# EAGLE board MousePCB (EAGLE 9.7.0)
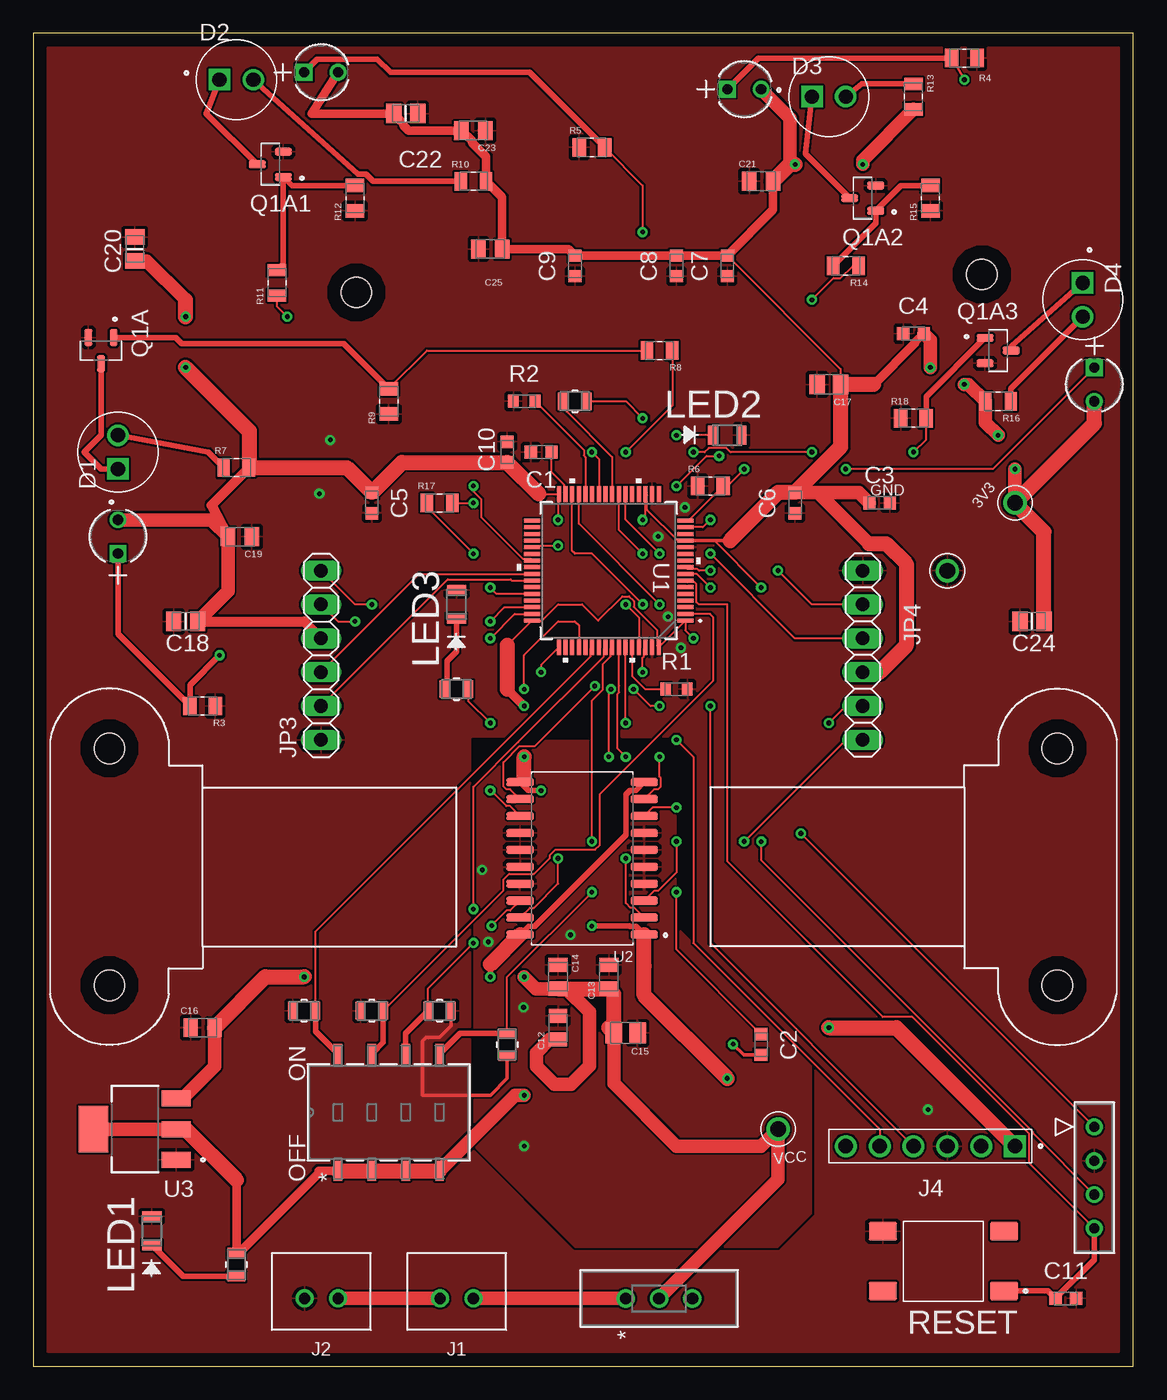
[diagram p0: board, top side]
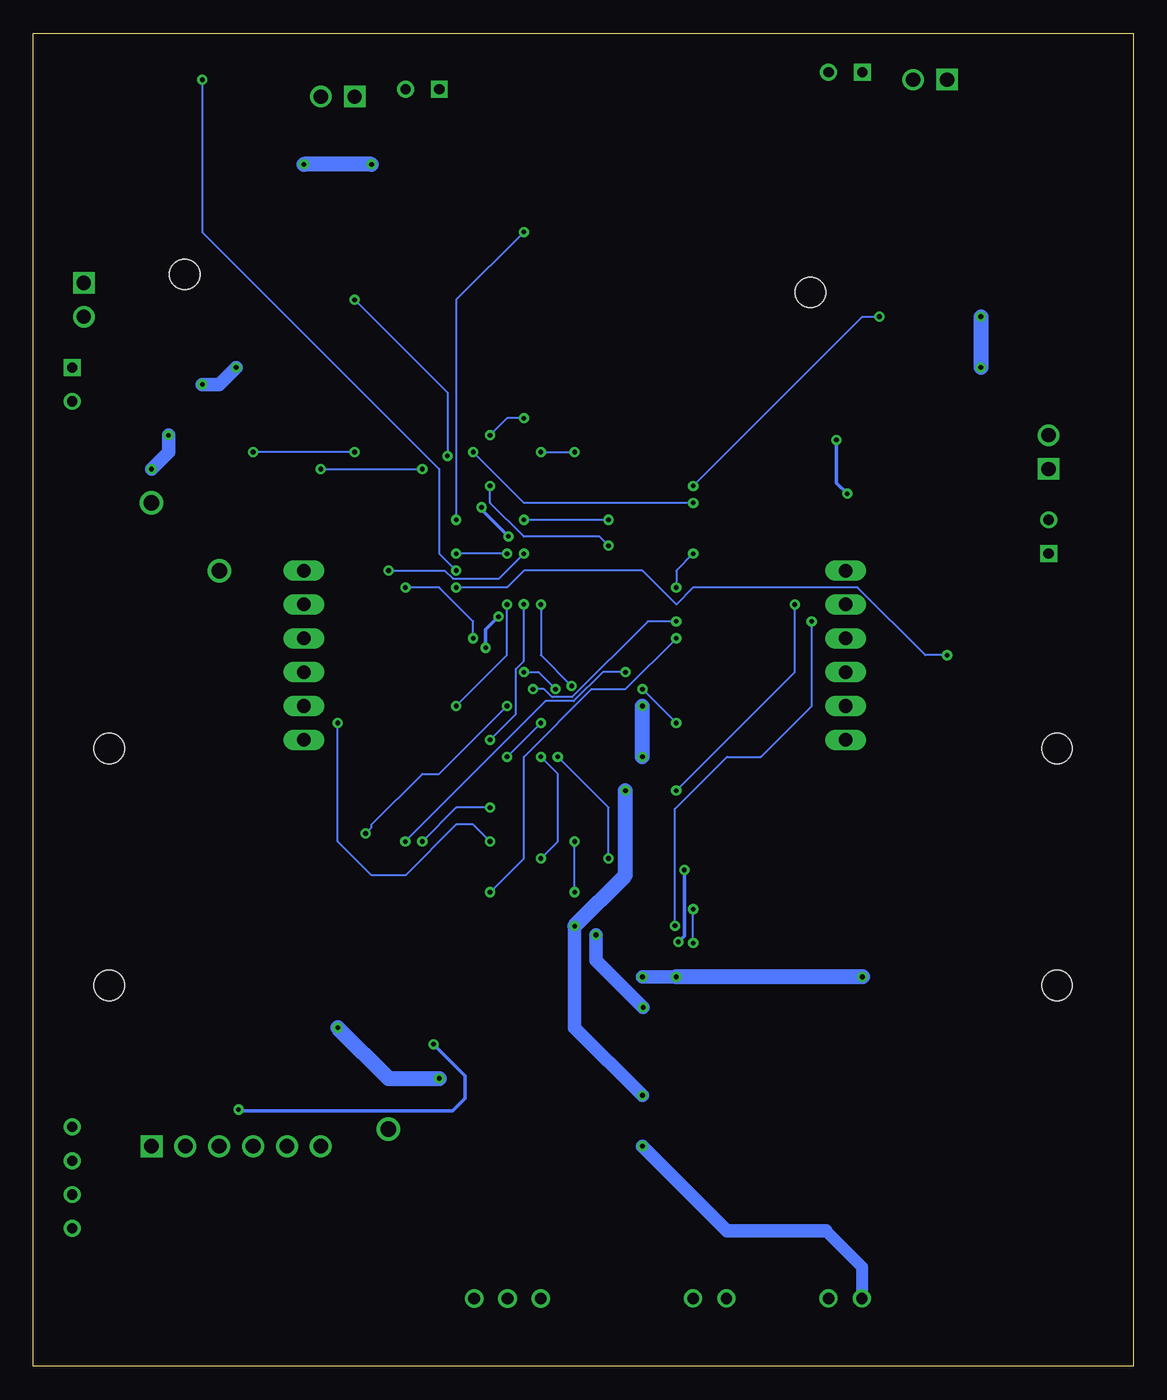
[diagram p1: board, bottom side, seen from below]

Size 82.53 x 100 mm. Coordinates in mm from the lower left corner, seen from the top.
Outline: 0,0 82.53,0 82.53,100 0,100 0,0
Copper layers (1*16): Top / Bottom
Stack-up Default Layer Stack: Top User Defined 0.035mm / Dielectric-1 User Defined 1.5mm / Bottom User Defined 0.035mm
Design rules: minimum drill size 0.35mm, minimum copper width 6mil, keepout clearance 0mil, drill distance 6mil, dimension clearance 40mil, restrict clearance 0mil, copper clearance wire_polygon to wire_polygon 6mil, copper clearance wire_polygon to pad_smd 6mil, copper clearance wire_polygon to via 6mil, copper clearance pad_smd to pad_smd 6mil, copper clearance pad_smd to via 6mil, copper clearance via to via 6mil, copper clearance smd to pad (same net) 6mil, copper clearance smd to via (same net) 6mil, copper clearance smd to smd (same net) 6mil
Holes 2.29 mm at 24.23,80.57 71.17,81.92

## Footprints (pad centres in the part's own frame; a part is rotated, then mirrored left to right if it is on the bottom)
KEYSTONE_5000 = drill 1.17: 1 0,0
CAPC1608X85 = smd 0.921 x 0.97: 1 -0.775,0; 2 0.775,0
CAPC2012X135N = smd 1.05 x 1.38: 1 -0.888,0; 2 0.888,0
CAPC2012X140N = smd 1.08 x 1.42: 1 -0.895,0; 2 0.895,0
CAPC2012X88N = smd 1.24 x 1.56: 1 -0.885,0; 2 0.885,0
CAPC2012X145N = smd 1.15 x 1.47: 1 -0.88,0; 2 0.88,0
CAPC2012X140N' = smd 1.15 x 1.45: 1 -0.9,0; 2 0.9,0
LEDRD254W55D595H900 = drill 1.07 pad 1.61: A 1.27,0 | drill 1.07 pad 1.61 square: C -1.27,0
B2B-XH-A = drill 0.84: 1 0,0; 2 2.5,0
CONN_PPTC041LFBN-RC_SUL = drill 0.762 pad 1.27: 1 0,0; 2 -2.54,0; 3 -5.08,0; 4 -7.62,0
WURTH_61300611121 = drill 1.1 pad 1.45 square: 01 -6.35,0 | drill 1.1 pad 1.45: 02 -3.81,0; 03 -1.27,0; 04 1.27,0; 05 3.81,0; 06 6.35,0
1X06 = drill 1.016 long: 1 -6.35,0; 2 -3.81,0; 3 -1.27,0; 4 1.27,0; 5 3.81,0; 6 6.35,0
LED_CMD17-21VGD_TR8 = smd 0.762 x 1.448: 1 -1.067,0; 2 1.067,0
MOTOR = hole 2.286: -28.575,14.605; -28.575,-3.175
SOT95P230X110-3N = smd 1.26 x 0.59: 1 -0.98,0.95; 2 -0.98,-0.95; 3 0.98,0
NONEP157X157-2_LTO = drill 0.762 pad 1.27 square: 1 0,0 | drill 0.762 pad 1.27: 2 2.54,0
RESC1608X60 = smd 0.799 x 0.974: 1 -0.815,0; 2 0.815,0
RESC2012X65N = smd 1.01 x 1.38: 1 -0.95,0; 2 0.95,0
RESC2012X60N = smd 0.92 x 1.38: 1 -0.955,0; 2 0.955,0
RES_RMCF0805_STP-L = smd 0.762 x 1.295: 1 -0.876,0; 2 0.876,0
STA_RMCF0805_STP-L = smd 0.711 x 1.295: 1 -0.851,0; 2 0.851,0
TE_FSM4JSMA = smd 2.1 x 1.38: 1 -4.55,2.24; 2 4.55,2.24; 3 -4.55,-2.24; 4 4.55,-2.24
219-4-M_CTS-L = smd 1.499 x 0.635: 1 -4.394,3.81; 2 -4.394,1.27; 3 -4.394,-1.27; 4 -4.394,-3.81; 5 4.394,-3.81; 6 4.394,-1.27; 7 4.394,1.27; 8 4.394,3.81
SW_1218_EWI = drill 0.889 pad 1.397: 1 0,0; 2 0,-2.5; 3 0,-5
LQFP64-10X10MM = smd 1.194 x 0.305: 1 -5.75,3.75; 2 -5.75,3.25; 3 -5.75,2.75; 4 -5.75,2.25; 5 -5.75,1.75; 6 -5.75,1.25; 7 -5.75,0.75; 8 -5.75,0.25; 9 -5.75,-0.25; 10 -5.75,-0.75; 11 -5.75,-1.25; 12 -5.75,-1.75; 13 -5.75,-2.25; 14 -5.75,-2.75; 15 -5.75,-3.25; 16 -5.75,-3.75; 33 5.75,-3.75; 34 5.75,-3.25; 35 5.75,-2.75; 36 5.75,-2.25; 37 5.75,-1.75; 38 5.75,-1.25; 39 5.75,-0.75; 40 5.75,-0.25; 41 5.75,0.25; 42 5.75,0.75; 43 5.75,1.25; 44 5.75,1.75; 45 5.75,2.25; 46 5.75,2.75; 47 5.75,3.25; 48 5.75,3.75 | smd 0.305 x 1.194: 17 -3.75,-5.75; 18 -3.25,-5.75; 19 -2.75,-5.75; 20 -2.25,-5.75; 21 -1.75,-5.75; 22 -1.25,-5.75; 23 -0.75,-5.75; 24 -0.25,-5.75; 25 0.25,-5.75; 26 0.75,-5.75; 27 1.25,-5.75; 28 1.75,-5.75; 29 2.25,-5.75; 30 2.75,-5.75; 31 3.25,-5.75; 32 3.75,-5.75; 49 3.75,5.75; 50 3.25,5.75; 51 2.75,5.75; 52 2.25,5.75; 53 1.75,5.75; 54 1.25,5.75; 55 0.75,5.75; 56 0.25,5.75; 57 -0.25,5.75; 58 -0.75,5.75; 59 -1.25,5.75; 60 -1.75,5.75; 61 -2.25,5.75; 62 -2.75,5.75; 63 -3.25,5.75; 64 -3.75,5.75
SOIC127P1032X265-20N = smd 2.05 x 0.6: 1 -4.655,5.715; 2 -4.655,4.445; 3 -4.655,3.175; 4 -4.655,1.905; 5 -4.655,0.635; 6 -4.655,-0.635; 7 -4.655,-1.905; 8 -4.655,-3.175; 9 -4.655,-4.445; 10 -4.655,-5.715; 11 4.655,-5.715; 12 4.655,-4.445; 13 4.655,-3.175; 14 4.655,-1.905; 15 4.655,-0.635; 16 4.655,0.635; 17 4.655,1.905; 18 4.655,3.175; 19 4.655,4.445; 20 4.655,5.715
SOT230P700X185-4N = smd 2.2 x 1.2: 1 -3.1,2.3; 2 -3.1,0; 3 -3.1,-2.3 | smd 2.2 x 3.5: 4 3.1,0

## Placement (x,y rotation side)
3V3  5000  [KEYSTONE_5000]  73.66,64.77 52.2 top
C1  2.2 μF  [CAPC1608X85]  38.1,68.58 180 top
C2  2.2 μF  [CAPC1608X85]  54.61,24.13 270 top
C3  0.1 μF  [CAPC1608X85]  63.5,64.77 0 top
C4  0.1 μF  [CAPC1608X85]  66.04,77.47 0 top
C5  1 μF  [CAPC1608X85]  25.4,64.77 270 top
C6  0.1 μF  [CAPC1608X85]  57.15,64.77 90 top
C7  0.1 μF  [CAPC1608X85]  52.07,82.55 90 top
C8  0.1 μF  [CAPC1608X85]  48.26,82.55 90 top
C9  0.1 μF  [CAPC1608X85]  40.64,82.55 90 top
C10  10 μF  [CAPC1608X85]  35.56,68.58 270 top
C11  0.1 μF  [CAPC1608X85]  77.47,5.08 0 top
C12  10uF  [CAPC2012X135N]  39.37,25.4 90 top
C13  4.7uF  [CAPC2012X140N]  43.18,29.21 90 top
C14  4.7uF  [CAPC2012X140N]  39.37,29.21 270 top
C15  0.1uF  [CAPC2012X88N]  44.45,25 180 top
C16  10 uF  [CAPC2012X135N]  12.7,25.4 0 top
C17  10 uF  [CAPC2012X145N]  59.69,73.66 180 top
C18  0.1uF  [CAPC2012X140N']  11.43,55.88 180 top
C19  4.7 uF  [CAPC2012X140N]  15.5,62.23 180 top
C20  0.1uF  [CAPC2012X140N']  7.62,83.82 90 top
C21  4.7 uF  [CAPC2012X140N]  54.61,88.9 0 top
C22  0.1uF  [CAPC2012X140N']  27.94,93.98 0 top
C23  4.7 uF  [CAPC2012X140N]  33.02,92.71 180 top
C24  0.1uF  [CAPC2012X140N']  74.93,55.88 180 top
C25  4.7 uF  [CAPC2012X140N]  34.29,83.82 0 top
D1  IREMITTER  [LEDRD254W55D595H900]  6.35,68.58 90 top
D2  IREMITTER  [LEDRD254W55D595H900]  15.24,96.52 0 top
D3  IREMITTER  [LEDRD254W55D595H900]  59.69,95.25 0 top
D4  IREMITTER  [LEDRD254W55D595H900]  78.74,80.01 270 top
GND  5000  [KEYSTONE_5000]  68.58,59.69 0 top
J1  B2B-XH-A  [B2B-XH-A]  33.02,5.08 180 top
J2  B2B-XH-A  [B2B-XH-A]  22.86,5.08 180 top
J3  [CONN_PPTC041LFBN-RC_SUL]  79.61,17.95 90 top
J4  [WURTH_61300611121]  67.31,16.51 180 top
JP3  PINHD-1X6  [1X06]  21.59,53.34 90 top
JP4  PINHD-1X6  [1X06]  62.23,53.34 270 top
LED1  [LED_CMD17-21VGD_TR8]  8.89,10.16 90 top
LED2  [LED_CMD17-21VGD_TR8]  52.07,69.85 0 top
LED3  [LED_CMD17-21VGD_TR8]  31.75,57.15 90 top
M1  MOTOR  [MOTOR]  48.26,43.18 180 top
M2  MOTOR  [MOTOR]  34.29,31.75 0 top
Q1A  MOSFET  [SOT95P230X110-3N]  5.08,76.2 270 top
Q1A1  MOSFET  [SOT95P230X110-3N]  17.78,90.17 180 top
Q1A2  MOSFET  [SOT95P230X110-3N]  62.23,87.63 180 top
Q1A3  MOSFET  [SOT95P230X110-3N]  72.39,76.2 0 top
Q2A  [NONEP157X157-2_LTO]  52.07,95.81 0 top
Q2A1  [NONEP157X157-2_LTO]  6.35,60.96 90 top
Q2A2  [NONEP157X157-2_LTO]  20.32,97.08 0 top
Q2A3  [NONEP157X157-2_LTO]  79.61,74.93 270 top
R1  10K  [RESC1608X60]  48.26,50.8 0 top
R2  10K  [RESC1608X60]  36.83,72.39 0 top
R3  1.8 kOhms  [RESC2012X65N]  12.7,49.53 180 top
R4  1.8 kOhms  [RESC2012X65N]  69.85,98.14 180 top
R5  1.8 kOhms  [RESC2012X65N]  41.91,91.44 0 top
R6  1.8 kOhms  [RESC2012X65N]  50.8,66.04 0 top
R7  51 Ohms  [RESC2012X60N]  15.24,67.42 0 top
R8  100 Ohms  [RESC2012X60N]  46.99,76.2 180 top
R9  47 Ohms  [RESC2012X65N]  26.67,72.39 90 top
R10  51 Ohms  [RESC2012X60N]  33.02,88.9 0 top
R11  100 Ohms  [RESC2012X60N]  18.28,81.28 90 top
R12  47 Ohms  [RESC2012X65N]  24.13,87.63 90 top
R13  51 Ohms  [RESC2012X60N]  66.04,95.25 270 top
R14  100 Ohms  [RESC2012X60N]  60.96,82.55 180 top
R15  47 Ohms  [RESC2012X65N]  67.31,87.63 90 top
R16  51 Ohms  [RESC2012X60N]  72.39,72.39 180 top
R17  100 Ohms  [RESC2012X60N]  30.48,64.77 0 top
R18  47 Ohms  [RESC2012X65N]  66.04,71.12 0 top
R19  64.9 Ohm  [RES_RMCF0805_STP-L]  15.24,7.62 270 top
R20  64.9 Ohm  [RES_RMCF0805_STP-L]  31.75,50.8 180 top
R21  64.9 Ohm  [RES_RMCF0805_STP-L]  40.64,72.39 0 top
R22  4.7 kOhm  [STA_RMCF0805_STP-L]  20.32,26.67 0 top
R23  4.7 kOhm  [STA_RMCF0805_STP-L]  25.4,26.67 0 top
R24  4.7 kOhm  [STA_RMCF0805_STP-L]  30.48,26.67 180 top
R25  4.7 kOhm  [STA_RMCF0805_STP-L]  35.56,24.13 90 top
RESET  FSM4JSMA  [TE_FSM4JSMA]  68.29,7.89 180 top
SW1  [219-4-M_CTS-L]  26.67,19.05 90 top
SW2  EG1218SW_1218_EWI  [SW_1218_EWI]  44.45,5.08 90 top
U1  [LQFP64-10X10MM]  43.18,59.69 180 top
U2  L293DD  [SOIC127P1032X265-20N]  41.18,38.1 180 top
U3  [SOT230P700X185-4N]  7.62,17.78 180 top
VCC  5000  [KEYSTONE_5000]  55.88,17.78 184.4 top

## Library data of the parts
3V3 GND VCC = Keystone Test Point; AVAILABILITY: In Stock; DESCRIPTION: PC Test Point - Miniature; MF: Keystone Electronics; MP: 5000; PACKAGE: Test Point Keystone Electronics; PRICE: None; PURCHASE-URL: https://pricing.snapeda.com/search/part/5000/?ref=eda
C1-C6 = Capacitor; CATEGORY: Capacitor
C7-C11 = Capacitor2; CATEGORY: Capacitor
C12 C16 = Capacitor 10 uF
C13 C14 C19 C21 C23 C25 = Capacitor 4.7uF
C15 = C0805C104K4RAC; CHECK_PRICES: https://www.snapeda.com/parts/C0805C104K4RAC/KEMET/view-part/?ref=eda; DESCRIPTION: 0.1µF ±10% 16V Ceramic Capacitor X7R 0805 (2012 Metric); MF: KEMET; MP: C0805C104K4RAC; PACKAGE: 0805 Kemet; SNAPEDA_LINK: https://www.snapeda.com/parts/C0805C104K4RAC/KEMET/view-part/?ref=snap
C17 = Capacitor_22uF
C18 C20 C22 C24 = Cap0-1uF
D1-D4 = emitter; MANUFACTURER: Vishay; MAXIMUM_PACKAGE_HEIGHT: 9.0 mm; PARTREV: 2.4; STANDARD: IPC-7351B
J1 J2 = Connector; CATEGORY: Header; DESCRIPTION: Connector Header Through Hole 2 position 0.098" (2.50mm); MANUFACTURER: JST Sales America Inc.; MPN: B2B-XH-A(LF)(SN); OPERATING_TEMPERATURE: -25°C ~ 85°C; PART_STATUS: ACTIVE; PITCH: 0.098" (2.50mm); ROHS_COMPLIANCE: ROHS3 Compliant; SERIES: XH; SUB_CATEGORY: Rectangular Connectors; TYPE: Header, Male Pin, Board to Cable/Wire, Through Hole
J3 = programmingheader; COPYRIGHT: Copyright (C) 2024 Ultra Librarian. All rights reserved.; MANUFACTURER_PART_NUMBER: PPTC041LFBN-RC; MFR_NAME: Sullins
J4 = IMU_header; AVAILABILITY: In Stock; DESCRIPTION: Connector Header Through Hole 6 position 0.100 (2.54mm); MF: Würth Elektronik; MP: 61300611121; PACKAGE: None; PRICE: None; PURCHASE-URL: https://pricing.snapeda.com/search/part/61300611121/?ref=eda
JP3 JP4 = Connector; CATEGORY: Headers; DESCRIPTION: Header, Straight, 6 Position; MANUFACTURER: Generic; MPN: Generic; OPERATING_TEMPERATURE: Generic; PART_STATUS: Active; PITCH: 0.100" (2.54mm); ROHS_COMPLIANCE: Generic; SERIES: Generic; SUB-CATEGORY: Headers, Male Pins; TYPE: Board to Board or Cable, Unshrouded, Through Hole, Straight
LED1-LED3 = SNAPgreenLED; LEDCOLOR: Green; MPN: CMD17-21VGD_TR8; OC_FARNELL: -; OC_NEWARK: 34C8662; PACKAGE: 2 -PIN LED; SUPPLIER: CHICAGO MINIATURE LIGHTING
M1 M2 = micromouseMotors
Q1A Q1A1-Q1A3 = MOSFET_SMD; MANUFACTURER: Nexperia; MAXIMUM_PACKAGE_HEIGHT: 1.1mm; PARTREV: 7; STANDARD: IPC-7351B
Q2A Q2A1-Q2A3 = Phototransistor; COPYRIGHT: Copyright (C) 2024 Ultra Librarian. All rights reserved.; MANUFACTURER_PART_NUMBER: LTR-4206E; MFR_NAME: LITE-ON
R1 R2 = Resistor2; CATEGORY: Resistor; SUB-CATEGORY: Fixed
R3-R6 = Resistor1.8kOhms; CHECK_PRICES: https://www.snapeda.com/parts/RMCF0805JT1K80/Stackpole+Electronics+Inc/view-part/?ref=eda; DESCRIPTION: 1.8 kOhms ±5% 0.125W, 1/8W Chip Resistor 0805 (2012 Metric) Automotive AEC-Q200 Thick Film; DIGIKEY_PART_NUMBER: RMCF0805JT1K80TR-ND; MF: Stackpole Electronics Inc; MP: RMCF0805JT1K80; PACKAGE: 2012 Stackpole; PURCHASE-URL: https://www.snapeda.com/api/url_track_click_mouser/?unipart_id=3950781&manufacturer=Stackpole Electronics Inc&part_name=RMCF0805JT1K80&search_term=None; SNAPEDA_LINK: https://www.snapeda.com/parts/RMCF0805JT1K80/Stackpole+Electronics+Inc/view-part/?ref=snap
R7 R10 R13 R16 = LEDCurrentResistor51Ohms
R8 R11 R14 R17 = MCU Pin Current Limiter Resistor 100 Ohms
R9 R12 R15 R18 = RMCF0805JT47K0
R19-R21 = Resistor64.9Ohm; COPYRIGHT: Copyright (C) 2024 Ultra Librarian. All rights reserved.; MANUFACTURER_PART_NUMBER: RMCF0805FT64R9; MFR_NAME: Stackpole International
R22-R25 = PullDownResistor4.7Ohms; COPYRIGHT: Copyright (C) 2024 Ultra Librarian. All rights reserved.; MANUFACTURER_PART_NUMBER: RMCF0805JT4K70; MFR_NAME: Stackpole International
RESET = FSM4JSMA; COMMENT: 4-1437565-1; CONFIGURATION_POLE-THROW: Single Pole - Single Throw; CONTACT_CURRENT_RATING: 50 mA; DESCRIPTION: Tactile Switch SPST-NO Top Actuated Surface Mount; DIGI-KEY_PART_NUMBER: 450-1759-2-ND; EU_ROHS_COMPLIANCE: Compliant; MF: TE Connectivity; MP: FSM4JSMA; PACKAGE: None; PURCHASE-URL: https://pricing.snapeda.com/search/part/FSM4JSMA/?ref=eda
SW1 = DipSwitch4Pin; COPYRIGHT: Copyright (C) 2024 Ultra Librarian. All rights reserved.; MANUFACTURER_PART_NUMBER: 219-4MSTR; MFR_NAME: CTS Components
SW2 = powerswitch; COPYRIGHT: Copyright (C) 2024 Ultra Librarian. All rights reserved.; MANUFACTURER_PART_NUMBER: EG1218; MFR_NAME: E-Switch
U1 = stm32f205rgt6; COPYRIGHT: Copyright (C) 2021 Ultra Librarian. All rights reserved.; MANUFACTURER_PART_NUMBER: STM32F205RGT6; MFR_NAME: STMicroelectronics
U2 = L293DD; MANUFACTURER: STMicroelectronics; PARTREV: N/A; STANDARD: IPC-7351B
U3 = AZ1117IH-3.3TRG1; AVAILABILITY: In Stock; CHECK_PRICES: https://www.snapeda.com/parts/AZ1117IH-3.3TRG1/Diodes+Inc./view-part/?ref=eda; DESCRIPTION: Linear Voltage Regulator IC Positive Fixed 1 Output 1A SOT-223-3; MF: Diodes Inc.; MP: AZ1117IH-3.3TRG1; PACKAGE: SOT-223 Diodes Inc.; PRICE: None; PURCHASE-URL: https://www.snapeda.com/api/url_track_click_mouser/?unipart_id=490259&manufacturer=Diodes Inc.&part_name=AZ1117IH-3.3TRG1&search_term=az1117ih-3.3trg1; SNAPEDA_LINK: https://www.snapeda.com/parts/AZ1117IH-3.3TRG1/Diodes+Inc./view-part/?ref=snap

## Nets
3V3: 3V3.1 C3.1 C4.2 C5.1 C6.2 C7.2 C8.2 C9.2 C10.2 C17.1 C18.1 C19.2 C20.1 C21.2 C22.1 C23.2 C24.1 C25.2 J4.01 JP3.4 JP4.4 Q2A1.2 Q2A2.2 Q2A3.2 Q2A.2 R7.2 R10.2 R13.2 R16.2 R19.1 SW1.1 SW1.2 SW1.3 SW1.4 U1.1 U1.13 U1.19 U1.32 U1.48 U1.64 U2.1 U2.11 U3.2 U3.4
GND: C1.2 C2.2 C3.2 C4.1 C5.2 C6.1 C7.1 C8.1 C9.1 C10.1 C11.2 C16.1 C17.2 C18.2 C19.1 C20.2 C21.1 C22.2 C23.1 C24.2 C25.1 GND.1 J2.2 J3.2 J4.03 JP3.1 JP4.1 LED1.2 LED2.2 LED3.2 Q1A1.2 Q1A2.2 Q1A3.2 Q1A.2 R1.2 R2.1 R3.1 R4.1 R5.1 R6.1 R9.1 R12.1 R15.1 R18.1 R22.1 R23.1 R24.1 R25.1 RESET.4 U1.12 U1.18 U1.63 U3.1
MGND: C12.2 C13.2 C14.1 C15.1 U2.4 U2.5 U2.6 U2.7 U2.14 U2.15 U2.16 U2.17
ML-1: JP4.6 U2.8
ML-2: JP4.5 U2.3
MR-1: JP3.5 U2.18
MR-2: JP3.6 U2.13
N$1: C1.1 U1.31
N$2: C2.1 U1.47
N$3: R1.1 U1.60
N$4: R2.2 U1.28
N$5: D1.A R7.1
N$6: Q1A.1 R8.2 R9.2
N$7: J1.2 J2.1
N$8: J1.1 SW2.1
N$9: D1.C Q1A.3
N$10: D2.A R10.1
N$11: Q1A1.1 R11.2 R12.2
N$12: D2.C Q1A1.3
N$13: D3.A R13.1
N$14: Q1A2.1 R14.2 R15.2
N$15: D3.C Q1A2.3
N$16: D4.A R16.1
N$17: Q1A3.1 R17.2 R18.2
N$18: D4.C Q1A3.3
N$19: LED3.1 R20.2
N$20: LED2.1 R21.2
N$21: LED1.1 R19.2
NRST: C11.1 J3.4 RESET.1 U1.7
PA1: Q2A2.1 R5.2 U1.15
PA2: Q2A3.1 R6.2 U1.16
PA6: JP4.3 U1.22
PA7: JP4.2 U1.23
PA8: JP3.3 U1.41
PA9: JP3.2 U1.42
PA11: R17.1 U1.44
PB0: R8.1 U1.26
PB4: R24.2 SW1.6 U1.56
PB5: R25.2 SW1.5 U1.57
PB6: U1.58 U2.2
PB7: U1.59 U2.9
PB8: U1.61 U2.12
PB9: U1.62 U2.19
PC0: Q2A1.1 R3.2 U1.8
PC1: Q2A.1 R4.2 U1.9
PC4: R21.1 U1.24
PC6: R14.1 U1.37
PC8: R11.1 U1.39
PC11: R20.1 U1.52
PC12: U1.53
PC13: R23.2 SW1.7 U1.2
PD2: R22.2 SW1.8 U1.54
SCL: J4.04 U1.29
SDA: J4.05 U1.30
SWCLK: J3.1 U1.46
SWDIO: J3.3 U1.49
VCC: C12.1 C13.1 C14.2 C15.2 C16.2 SW2.2 U2.10 U2.20 U3.3 VCC.1

## Tracks (layer width: path | path; a pad name or v marks a point on that pad's centre or on a via)
3V3  (via drill 0.35)
  Top 0.152: 37.92,65.44 U1.32 39.37,65.38 v39.37,63.5 | U2.11 36.83,44.12 | 35.56,54.07 U1.48 38.04,55.94 38.1,55.88 39.37,57.15 41.17,57.15 42.38,55.94 44.2,57.76 44.7,57.76 45.06,57.4 45.06,56.97 46.81,55.22 46.81,54.06 U1.64 U1.1 48.93,55.21 v49.53,54.61 | C7.2 60.57,74.83 C17.1 | v45.72,63.5 45.93,63.71 U1.19 46.05,65.32 46.05,64.25 48.36,61.94 U1.13 51.09,61.94 v54.61,58.42
  Top 0.254: 52.28,61.94 U1.13
  Top 0.406: U2.1 45.22,33 44.75,33 44.73,33.02 v41.91,33.02 | v38.1,43.18 37.63,43.18 37.61,43.2 37.14,43.2 U2.11
  Top 0.635: 15.24,13.97 R19.1 15.43,8.5 21.59,14.66 | 11.43,17.78 U3.2 | 21.4,14.66 21.59,14.66 | 21.59,14.66 SW1.1 | Q2A2.2 20.88,93.98 C22.1 27.8,93.22 27.8,93.06 28.14,92.71 C23.2 32.91,91.93 32.91,91.81 33.97,90.73 R10.2 35.19,87.69 C25.2 40.14,83.82 C9.2 C8.2 C7.2 55.5,86.76 C21.2 | C4.2 66.2,76.85 66.2,76.79 63.06,73.66 | v36.83,49.53 35.56,50.8
  Top 0.762: C19.2 13.38,64.6 R7.2 | C18.1 20.32,55.88 JP3.4
  Top 1.016: 62.72,61.7 58.88,65.55 C6.2 61.95,65.55 C3.1 | 11.43,80.01 8.52,82.92 C20.1 | Q2A1.2 13.34,63.5 C19.2 14.61,58.16 C18.1 | Q2A.2 56.78,93.64 56.78,90.17 | R13.2 62.23,90.48 v62.23,90.17 | 3V3.1 v73.66,67.31 | v72.39,69.85 71.44,70.81 R16.2 70.17,73.66 v69.85,73.66 | v67.31,74.93 67.31,76.97 C4.2 | SW1.4 36.14,20.32 v36.83,20.32 | SW1.2 SW1.3 | U3.4 U3.2
  Top 1.143: 15.24,13.97 11.43,17.78 | SW1.1 SW1.3 SW1.4 | 63.06,73.66 C17.1 60.57,68.97 C6.2 55.88,65.55 52.28,61.94 | 62.72,61.7 64,61.7 65.49,60.2 65.49,54.06 63.5,52.07 JP4.4 | v11.43,78.74 11.43,80.01 | v11.43,74.93 16.2,70.17 R7.2 23.53,67.42 C5.1 27.66,67.81 C10.2 37.92,65.44 | 45.84,30.01 U2.1 45.84,27.82 v52.07,21.59 | 36.83,44.12 v36.83,45.72 | 35.56,54.07 35.56,50.8 | C21.2 56.78,90.17 v57.15,90.17 | C24.1 75.83,62.6 3V3.1 79.61,70.72 Q2A3.2 | v59.69,25.4 64.77,25.4 J4.01
  Bottom 0.152: v39.37,63.5 v45.72,63.5 | v54.61,58.42 52.07,58.42 49.53,55.88 v49.53,54.61
  Bottom 1.016: v73.66,67.31 72.39,68.58 v72.39,69.85 | v69.85,73.66 68.58,73.66 v67.31,74.93 | v36.83,20.32 41.91,25.4 v41.91,33.02
  Bottom 1.143: v11.43,78.74 v11.43,74.93 | v41.91,33.02 38.1,36.83 v38.1,43.18 | v36.83,45.72 v36.83,49.53 | v57.15,90.17 v62.23,90.17 | v59.69,25.4 55.88,21.59 v52.07,21.59
GND  (via drill 0.35)
  Top 0.254: R25.1 35.56,21.59 34.29,20.32 29.21,20.32 29.21,24.41 29.46,24.66 30.48,24.66 31.33,25.51 R24.1 | v52.5,24.16 53.3,23.36 C2.2
  Bottom 0.254: v52.5,24.16 50.14,21.79 50.14,20.09 51.08,19.15 67.03,19.15 v67.13,19.25 | v48.89,64.44 48.89,64.26 v46.89,62.26 | v22.28,69.49 22.28,66.27 v21.46,65.46 | v47.62,56.24 48.59,55.27 v48.59,53.9
  pour Top (rank 2): 0,0 82.55,0 82.55,100.33 0,100.33
MGND  (via drill 0.35)
  Bottom 0.254: v33.68,37.24 33.68,32.28 v34.14,31.83
  Bottom 0.889: 23.06,10.16 20.34,7.44 20.34,5
  Bottom 1.016: v36.83,16.51 30.48,10.16 23.06,10.16 | v40.31,32.36 40.31,30.45 v36.78,26.92
  pour Top: 33.02,16.51 40.64,8.89 55.88,8.89 58.42,11.43 58.42,22.86 48.26,33.02 48.26,46.99 33.02,46.99
ML-1  (via drill 0.35)
  Top 0.152: U2.8 46.47,41.91 v48.26,41.91 | v53.34,39.37 60.96,46.99 JP4.6
  Bottom 0.152: v48.26,41.91 50.8,41.91 v53.34,39.37
ML-2  (via drill 0.35)
  Top 0.152: U2.3 46.58,35.67 46.87,35.67 48.26,37.06 v48.26,39.37 | v59.69,48.26 60.96,49.53 JP4.5
  Bottom 0.152: v48.26,39.37 49.53,40.64 50.8,40.64 54.61,36.83 57.15,36.83 59.69,39.37 v59.69,48.26
MR-1  (via drill 0.35)
  Top 0.152: U2.18 35.79,34.18 35.5,34.18 34.39,33.08 v34.39,33.05 | v24.13,55.88 22.86,55.88 JP3.5
  Bottom 0.152: v34.39,33.05 34.39,41.81 30.48,45.72 27.94,45.72 24.13,49.53 v24.13,55.88
MR-2  (via drill 0.35)
  Top 0.152: U2.13 35.79,42.02 35.5,42.02 34.33,43.18 v34.29,43.18 | v25.4,57.15 24.13,57.15 JP3.6
  Bottom 0.152: v34.29,43.18 25.4,52.07 v25.4,57.15
N$1
  Top 0.152: U1.31 39.81,65.56 39.81,66.13 38.88,67.07 C1.1
N$2  (via drill 0.35)
  Top 0.152: C2.1 48.26,31.25 v48.26,35.56 | v34.29,54.61 36.12,56.44 U1.47
  Bottom 0.152: v48.26,35.56 45.72,38.1 45.72,45.72 40.64,50.8 38.1,50.8 v34.29,54.61
N$3
  Top 0.152: U1.60 44.93,51.77 45.89,50.8 R1.1
N$4
  Top 0.152: R2.2 41.3,68.73 41.3,68.33 41.43,68.2 U1.28
N$5
  Top 0.406: D1.A 13.12,68.58 R7.1
N$6
  Top 0.152: R9.2 29.53,76.2 R8.2
  Top 0.406: Q1A.1 10.68,77.18 11.13,76.74 23.27,76.74 R9.2
N$7
  Top 1.016: J2.1 J1.2
N$8
  Top 1.016: J1.1 SW2.1
N$9
  Top 0.406: Q1A.3 5.08,74.93 5.08,69.85 3.81,68.58 5.08,67.31 D1.C
N$10
  Top 0.406: D2.A 24.36,89.44 24.97,89.44 25.51,88.9 R10.1
N$11
  Top 0.406: R12.2 19.4,88.58 Q1A1.1 18.76,82.71 R11.2
N$12
  Top 0.406: D2.C 12.98,93.99 Q1A1.3
N$13
  Top 0.406: D3.A 62.19,96.2 R13.1
N$14
  Top 0.406: R15.2 65.11,88.58 Q1A2.1 63.21,85.75 R14.2
N$15
  Top 0.406: D3.C 57.92,90.96 Q1A2.3
N$16
  Top 0.406: D4.A 73.34,73.34 R16.1
N$17  (via drill 0.35)
  Top 0.152: R17.2 v33.02,64.77 | v66.04,68.58 66.99,69.53 R18.2 | v49.53,68.58 50.37,68.58 50.69,68.9 52,68.9 52.32,68.58 v58.42,68.58
  Top 0.406: Q1A3.1 66.99,72.73 R18.2
  Bottom 0.152: v33.02,64.77 45.72,64.77 v49.53,68.58 | v58.42,68.58 v66.04,68.58
N$18
  Top 0.406: D4.C 73.37,76.54 Q1A3.3
N$19
  Top 0.406: R20.2 31.03,50.95 31.03,52.9 31.75,53.63 LED3.1
N$20  (via drill 0.35)
  Top 0.152: R21.2 44.45,72.39 v45.72,71.12 | LED2.1 v48.26,69.85
  Bottom 0.152: v45.72,71.12 46.99,71.12 v48.26,69.85
N$21
  Top 0.406: LED1.1 11.24,6.74 R19.2
NRST
  Top 0.152: J3.4 74.71,15.23 74.71,17.43 65.94,26.2 63.74,26.2 52.07,37.87 52.07,57.15 49.93,57.15 49.76,57.32 49.76,58.69 49.62,58.82 49.05,58.82 U1.7
  Top 0.406: RESET.1 76.13,5.65 C11.1 79.61,7.99 J3.4
PA1  (via drill 0.35)
  Top 0.152: R5.2 45.72,88.58 v45.72,85.09 | v50.8,63.5 50.24,62.94 U1.15
  Top 0.406: R5.2 37.22,97.08 26.8,97.08 25.81,98.07 21.31,98.07 Q2A2.1
  Bottom 0.152: v45.72,85.09 50.8,80.01 v50.8,63.5
PA2  (via drill 0.35)
  Top 0.152: Q2A3.1 71.99,67.31 v60.96,67.31 | v53.34,67.31 52.07,66.04 R6.2 49.15,63.44 U1.16
  Bottom 0.152: v60.96,67.31 v53.34,67.31
PA6  (via drill 0.35)
  Top 0.152: JP4.3 57.15,54.61 v50.8,60.96 | v46.99,60.96 44.43,63.52 U1.22
  Bottom 0.152: v46.99,60.96 v50.8,60.96
PA7  (via drill 0.35)
  Top 0.152: JP4.2 58.42,57.15 v55.88,59.69 | v45.72,60.96 43.93,62.75 U1.23
  Bottom 0.152: v55.88,59.69 51.66,59.69 51.05,59.08 47.6,59.08 v45.72,60.96
PA8
  Top 0.152: JP3.3 28.96,59.44 U1.41
PA9
  Top 0.152: U1.42 35.9,58.94 35.81,59.03 31.09,59.03 JP3.2
PA11  (via drill 0.35)
  Top 0.152: 37.31,57.82 U1.44 34.77,57.94 v34.29,58.42 | v33.02,60.96 29.52,64.45 R17.1
  Bottom 0.152: v33.02,60.96 34.29,59.69 v34.29,58.42
PB0  (via drill 0.35)
  Top 0.152: R8.1 47.94,72.08 v44.45,68.58 | v41.91,68.58 42.43,68.06 U1.26
  Bottom 0.152: v44.45,68.58 v41.91,68.58
PB4  (via drill 0.35)
  Top 0.152: R24.2 29.63,28.36 v33.02,31.75 | U1.56 42.81,53.82 42.81,53.25 36.39,46.83 36.37,46.83 33.02,43.47 v33.02,34.29
  Top 0.406: SW1.6 27.94,24.98 R24.2
  Bottom 0.152: v33.02,31.75 v33.02,34.29
PB5  (via drill 0.35)
  Top 0.152: R25.2 35.56,29.21 v41.91,35.56 | U1.57 43.31,53.82 43.31,53.25 42.74,52.68 42.74,50.77 41.91,49.94 v41.91,39.37
  Top 0.406: SW1.5 32.02,24.98 R25.2
  Bottom 0.152: v41.91,35.56 v41.91,39.37
PB6  (via drill 0.35)
  Top 0.152: U2.2 45.1,34.4 44.8,34.4 44.45,34.75 v44.45,38.1 | v44.45,45.72 43.84,46.33 43.84,50.44 43.96,50.55 43.96,51.05 43.93,51.08 U1.58
  Bottom 0.152: v44.45,38.1 43.18,39.37 43.18,44.45 v44.45,45.72
PB7  (via drill 0.35)
  Top 0.152: U2.9 46.58,43.29 46.87,43.29 47.09,43.51 47.09,44.12 46.99,44.22 v46.99,45.72 | v44.45,48.26 44.43,48.28 U1.59
  Bottom 0.152: v46.99,45.72 v44.45,48.26
PB8  (via drill 0.35)
  Top 0.152: U2.12 35.79,43.29 35.5,43.29 35.27,43.51 35.27,45.3 36.5,46.52 37.63,46.52 v42.13,51.02 | v44.45,57.15 45.43,56.17 U1.61
  Bottom 0.152: v44.45,57.15 44.45,53.34 v42.13,51.02
PB9  (via drill 0.35)
  Top 0.152: U2.19 37.27,34.4 37.56,34.4 39.37,36.21 v39.37,38.1 | v45.72,52.07 45.72,53.16 45.81,53.25 45.81,53.82 U1.62 | v43.18,45.72 43.18,50.63 v43.35,50.8
  Bottom 0.152: v39.37,38.1 39.37,41.91 v43.18,45.72 | v45.72,52.07 44.62,52.07 v43.35,50.8
PC0  (via drill 0.35)
  Top 0.152: v50.8,58.42 49.78,59.44 U1.8
  Top 0.406: Q2A1.1 6.35,54.93 R3.2 11.75,51.12 v13.97,53.34
  Bottom 0.152: v13.97,53.34 15.62,53.34 20.7,58.42 33.02,58.42 34.29,57.15 36.83,59.69 45.72,59.69 46.99,58.42 v50.8,58.42
PC1  (via drill 0.35)
  Top 0.152: R4.2 v69.85,96.52 | v50.8,59.69 49.96,59.69 49.83,59.82 49.05,59.82 U1.9
  Top 0.406: R4.2 54.4,98.14 Q2A.1
  Bottom 0.152: v69.85,96.52 69.85,85.09 52.07,67.31 52.07,60.96 v50.8,59.69
PC4
  Top 0.152: R21.1 40.04,72.11 40.04,71.61 43.43,68.22 U1.24
PC6  (via drill 0.35)
  Top 0.152: U1.37 37.55,61.56 v39.37,61.56 | v58.42,80.01 60.04,81.63 60.56,81.63 61.48,82.55 R14.1 | v48.26,66.04 50.51,68.29 v51.46,68.29
  Bottom 0.152: v48.26,66.04 48.26,64.77 45.72,62.23 40.04,62.23 v39.37,61.56 | v51.46,68.29 51.46,73.05 v58.42,80.01
PC8  (via drill 0.35)
  Top 0.152: U1.39 37.31,60.56 36.74,60.56 33.63,63.67 33.63,65.02 33.02,65.63 v33.02,66.04 | v19.05,78.74 18.28,79.51 R11.1
  Bottom 0.152: v33.02,66.04 20.32,78.74 v19.05,78.74
PC11  (via drill 0.35)
  Top 0.152: R20.1 32.63,49.92 v34.29,48.26 | v36.83,50.8 36.83,53.34 39.37,55.88 40.64,55.88 40.93,55.59 U1.52
  Bottom 0.152: v36.83,50.8 v34.29,48.26
PC13
  Top 0.152: U1.2 50.77,56.44 51.03,56.19 51.03,51.44 42.52,42.93 42.52,39.12 42.16,38.76 39.17,38.76 38.76,38.35 38.76,38.14 37.56,36.94 35.71,36.94 35.27,36.5 35.27,35.69 33.27,33.68 33.26,33.68 R23.2
  Top 0.406: SW1.7 26.25,24.3 R23.2
PD2
  Top 0.152: U1.54 41.81,53.82 41.81,53.25 21.17,32.61 R22.2
  Top 0.406: SW1.8 21.17,25.13 R22.2
SCL  (via drill 0.35)
  Top 0.152: J4.04 50.8,31.75 v50.8,49.53 | v46.99,57.15 40.93,63.21 U1.29
  Bottom 0.152: v50.8,49.53 46.99,53.34 v46.99,57.15
SDA  (via drill 0.35)
  Top 0.152: J4.05 63.5,17.78 49.53,31.75 49.53,45.72 v48.26,46.99 | U1.30 40.43,61.17 40.64,60.96 41.93,60.96 v45.73,57.16 | v45.73,57.16
  Bottom 0.152: v45.73,57.16 45.73,52.92 46.33,52.32 46.33,48.92 v48.26,46.99
SWCLK  (via drill 0.35)
  Top 0.152: J3.1 v57.59,39.97 | v46.99,49.53 46.31,49.53 v45.04,50.8 | v34.29,55.88 35.35,56.94 U1.46
  Bottom 0.152: v46.99,49.53 52.07,44.45 53.34,44.45 57.15,40.64 57.15,40.41 v57.59,39.97 | v34.29,55.88 36.42,55.88 42.11,50.19 43.6,50.19 44.21,50.8 v45.04,50.8
SWDIO  (via drill 0.35)
  Top 0.152: J3.3 75.02,17.46 75.02,17.56 54.62,37.95 v54.62,39.36 | v38.1,52.07 38.1,52.61 U1.49
  Bottom 0.152: v54.62,39.36 44.09,49.89 41.98,49.89 39.8,52.07 v38.1,52.07
VCC  (via drill 0.35)
  Top 0.406: v34.29,29.21 34.29,30.15 | U2.20 37.14,33 37.61,33 44.46,39.84 44.46,42.9 44.75,43.2 45.22,43.2 U2.10
  Top 0.635: 43.56,27.93 C13.1
  Top 1.016: C16.2 13.59,22.48 11.19,20.08 U3.3 | v36.83,29.21 37.72,28.32 C14.2 39.99,28.32 41.73,26.57 41.73,22.53 40.36,21.16 39.09,21.16 37.74,22.5 37.74,23.52 38.74,24.51 C12.1 | C15.2 43.56,21.2 48.26,16.51 54.61,16.51 VCC.1 55.88,14.01 SW2.2
  Top 1.143: 43.17,25.4 C15.2 43.56,27.93 | C14.2 C13.1 | C16.2 17.4,29.21 v20.32,29.21 | 34.29,30.15 U2.20
  Bottom 1.016: v36.83,29.21 v34.29,29.21
  Bottom 1.143: v20.32,29.21 v34.29,29.21